# EAGLE board gyro-board (EAGLE 6.5.0)
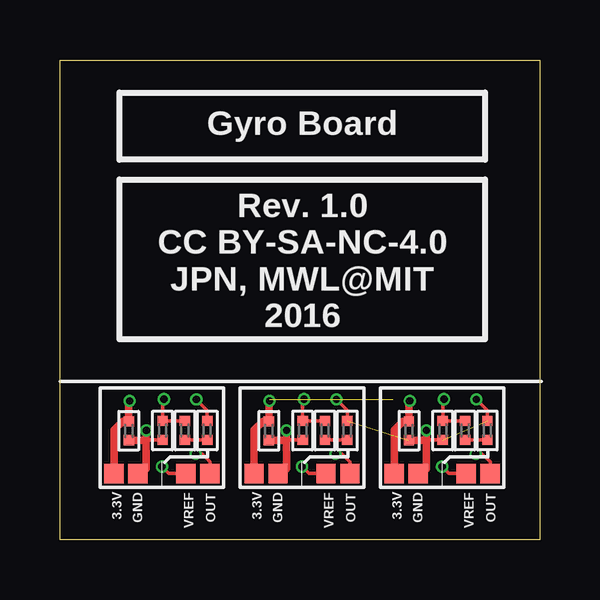
[diagram p0: board, top side]
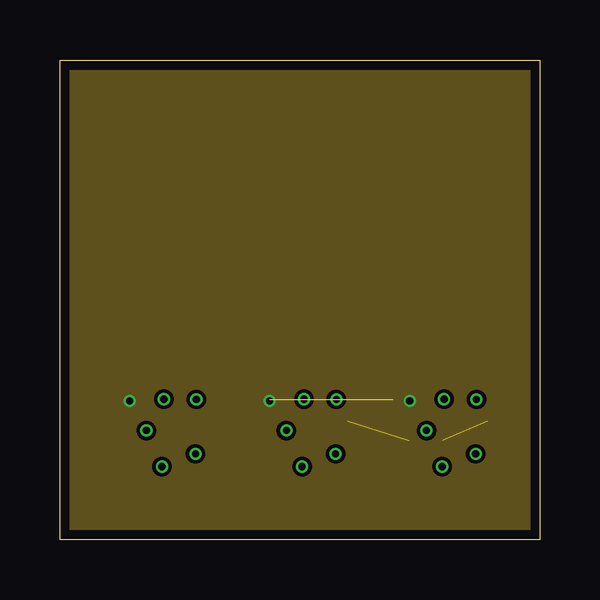
[diagram p1: board, inner layer Route2]
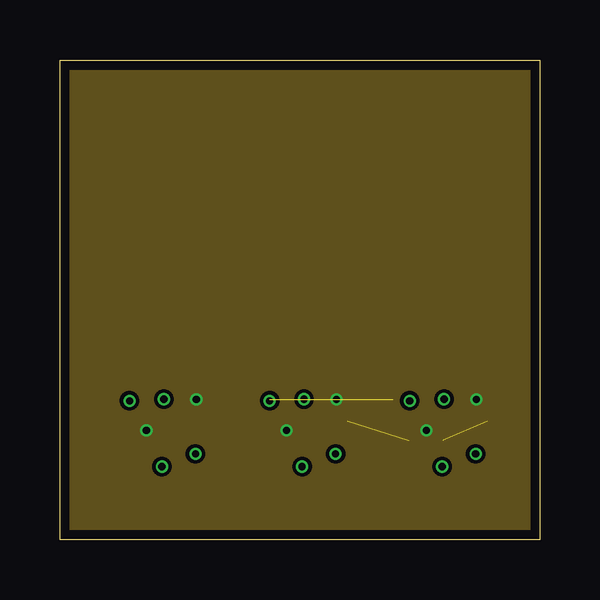
[diagram p2: board, inner layer Route15]
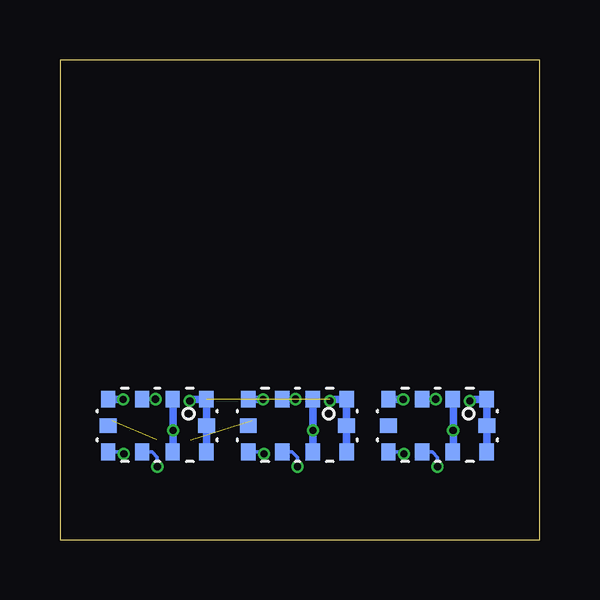
[diagram p3: board, bottom side, seen from below]

Size 20 x 20 mm. Coordinates in mm from the lower left corner, seen from the top.
Outline: 0,0 0,20 20,20 20,0 0,0
Copper layers (1*2*15*16): Top 0.035mm / dielectric 0.2mm / Route2 0.0175mm / dielectric 0.3mm / Route15 0.0175mm / dielectric 0.2mm / Bottom 0.035mm
Design rules "seeed-studio-4-layer": minimum track width 6mil, minimum drill 0.3mm, track to track 6mil, track to pad 6mil, pad to pad 6mil, via to via 6mil, smd to smd 0mil, copper to edge 0.4mm, drill to drill 10mil, minimum pad ring 6mil, minimum via ring 4mil, stop-mask expansion 4mil, vias tented up to drill 100mil, thermal gap 10mil

## Footprints (pad centres in the part's own frame; a part is rotated, then mirrored left to right if it is on the bottom)
0201 = smd 0.432 x 0.432: 1 -0.394,0; 2 0.394,0
TP08SQ = smd 0.8 x 0.8: TP 0,0
LGA-10-COMPACT = smd 0.6 x 0.7: 1 2.05,1.1; 2 0.635,1.1; 3 -0.635,1.1; 4 -2.05,1.1; 6 -2.05,-1.1; 7 -0.635,-1.1; 8 0.635,-1.1; 9 2.05,-1.1 | smd 0.7 x 0.6: 5 -2.05,0; 10 2.05,0

## Placement (x,y rotation side)
C1  470nF  [0201]  2.87,4.54 270 top
C2  470nF  [0201]  5.21,4.55 270 top
C3  10nF  [0201]  4.28,4.55 270 top
C4  10nF  [0201]  10.12,4.55 270 top
C5  470nF  [0201]  11.05,4.55 270 top
C6  470nF  [0201]  8.71,4.54 270 top
C7  10nF  [0201]  15.96,4.55 270 top
C8  470nF  [0201]  16.89,4.55 270 top
C9  470nF  [0201]  14.55,4.54 270 top
R1  10k  [0201]  6.14,4.55 90 top
R2  10k  [0201]  11.98,4.55 90 top
R3  10k  [0201]  17.82,4.55 90 top
TP1  [TP08SQ]  2.25,2.75 0 top
TP2  [TP08SQ]  6.25,2.75 0 top
TP3  [TP08SQ]  3.25,2.75 0 top
TP4  [TP08SQ]  8.1,2.75 0 top
TP5  [TP08SQ]  5.25,2.75 0 top
TP6  [TP08SQ]  12.1,2.75 0 top
TP7  [TP08SQ]  9.1,2.75 0 top
TP8  [TP08SQ]  11.1,2.75 0 top
TP9  [TP08SQ]  13.94,2.75 0 top
TP10  [TP08SQ]  17.94,2.75 0 top
TP11  [TP08SQ]  14.94,2.75 0 top
TP12  [TP08SQ]  16.94,2.75 0 top
U1  LY3200  [LGA-10-COMPACT]  4.25,4.75 0 bottom
U2  LY3200  [LGA-10-COMPACT]  10.1,4.75 0 bottom
U3  LY3200  [LGA-10-COMPACT]  15.94,4.75 0 bottom

## Library data of the parts
C1-C9 R1-R3 TP1-TP12 U1-U3 = jonnew

## Nets
+3.3V: C1.1 C6.1 C9.1 TP1.TP TP4.TP TP9.TP U1.1 U1.9 U1.10 U2.1 U2.9 U2.10 U3.1 U3.9 U3.10
GND: C1.2 C3.2 C4.2 C6.2 C7.2 C9.2 R1.2 R2.2 R3.2 TP3.TP TP7.TP TP11.TP U1.2 U1.4 U1.8 U2.2 U2.4 U2.8 U3.2 U3.4 U3.8
N$1: C4.1 C5.1 U2.3
N$2: C5.2 R2.1
N$3: C2.1 C3.1 U1.3
N$4: C2.2 R1.1
N$5: C7.1 C8.1 U3.3
N$6: C8.2 R3.1
OUT: TP2.TP U1.6
OUT1: TP6.TP U2.6
OUT2: TP10.TP U3.6
VREF: TP5.TP U1.7
VREF1: TP8.TP U2.7
VREF2: TP12.TP U3.7

## Tracks (layer width: path | path; a pad name or v marks a point on that pad's centre or on a via)
+3.3V  (via drill 0.3)  (1 unrouted)
  Top 0.305: v2.9,5.79 2.87,5.79 C1.1 2.62,4.93 2.25,4.56 TP1.TP | v8.74,5.79 8.71,5.79 C6.1 8.46,4.93 8.1,4.56 TP4.TP | v14.59,5.79 14.55,5.79 C9.1 14.3,4.93 13.94,4.56 TP9.TP
  Bottom 0.305: v2.9,5.79 2.9,5.85 U1.1 U1.10 U1.9 | v8.74,5.79 8.74,5.85 U2.1 U2.10 U2.9 | v14.59,5.79 14.59,5.85 U3.1 U3.10 U3.9
  pour Route2: -1,21 21,21 21,0 -1,0
GND  (via drill 0.3)  (2 unrouted)
  Top 0.152: v3.6,4.54 v3.6,4.55 3.6,4.16 C3.2 | R1.2 6.14,5.39 v5.69,5.84 | v9.45,4.54 v9.45,4.55 9.45,4.16 C4.2 | R2.2 11.98,5.39 v11.53,5.84 | v15.29,4.54 v15.29,4.55 15.29,4.16 C7.2 | R3.2 17.82,5.39 v17.37,5.84
  Top 0.305: TP3.TP 3.35,2.95 3.6,2.95 3.6,4.14 | 3.6,4.14 v3.6,4.55 | C1.2 3.6,4.14 | TP7.TP 9.19,2.95 9.45,2.95 9.45,4.14 | 9.45,4.14 v9.45,4.55 | C6.2 9.45,4.14 | TP11.TP 15.03,2.95 15.29,2.95 15.29,4.14 | 15.29,4.14 v15.29,4.55 | C9.2 15.29,4.14
  Bottom 0.152: U1.4 | 3.62,4.95 v3.6,4.55 | U2.4 | 9.46,4.95 v9.45,4.55 | U3.4 | 15.3,4.95 v15.29,4.55
  Bottom 0.305: U1.4 v5.69,5.84 | U1.8 3.6,3.65 v3.6,4.55 3.6,5.85 U1.2 | U2.4 v11.53,5.84 | U2.8 9.45,3.65 v9.45,4.55 9.45,5.85 U2.2 | U3.4 v17.37,5.84 | U3.8 15.29,3.65 v15.29,4.55 15.29,5.85 U3.2
  pour Route15: -2,22 22,22 22,-1 -2,-1
N$1  (via drill 0.3)
  Top 0.152: v10.18,5.85 10.12,5.8 C4.1 C5.1
  Bottom 0.152: U2.3 v10.18,5.85
N$2
  Top 0.152: R2.1 C5.2
N$3  (via drill 0.3)
  Top 0.152: v4.33,5.85 4.28,5.8 C3.1 C2.1
  Bottom 0.152: U1.3 v4.33,5.85
N$4
  Top 0.152: R1.1 C2.2
N$5  (via drill 0.3)
  Top 0.152: v16.02,5.85 15.96,5.8 C7.1 C8.1
  Bottom 0.152: U3.3 v16.02,5.85
N$6
  Top 0.152: R3.1 C8.2
OUT  (via drill 0.3)
  Top 0.152: 6.21,2.8 arc90 TP2.TP 6.25,3.24 5.92,3.58 v5.65,3.58
  Bottom 0.152: 6.3,3.55 U1.6 5.73,3.65 v5.65,3.58
OUT1  (via drill 0.3)
  Top 0.152: 12.05,2.8 arc90 TP6.TP 12.1,3.24 11.76,3.58 v11.49,3.58
  Bottom 0.152: 12.15,3.55 U2.6 11.57,3.65 v11.49,3.58
OUT2  (via drill 0.3)
  Top 0.152: 17.89,2.8 arc90 TP10.TP 17.94,3.24 17.6,3.58 v17.34,3.58
  Bottom 0.152: 17.99,3.55 U3.6 17.41,3.65 v17.34,3.58
VREF  (via drill 0.3)
  Top 0.152: v4.25,3.04 4.54,2.75 TP5.TP
  Bottom 0.152: U1.7 4.47,3.65 4.25,3.43 v4.25,3.04
VREF1  (via drill 0.3)
  Top 0.152: v10.1,3.04 10.38,2.75 TP8.TP
  Bottom 0.152: U2.7 10.32,3.65 10.1,3.43 v10.1,3.04
VREF2  (via drill 0.3)
  Top 0.152: v15.94,3.04 16.23,2.75 TP12.TP
  Bottom 0.152: U3.7 16.16,3.65 15.94,3.43 v15.94,3.04

## Text on the board
tPlace: Gyro Board | Rev. 1.0 / CC BY-SA-NC-4.0 / JPN, MWL@MIT / 2016 | 3.3V | GND | VREF | OUT | 3.3V | GND | VREF | OUT | 3.3V | GND | VREF | OUT